# Altium PCB Main.PcbDoc (part 2 of 2)
Units mil, origin at the board's own origin, x right, y up, seen from the top; angles counter-clockwise.
Board outline 5000 x 2500 mil, 2 copper layers (Top Layer, Bottom Layer), stack 62.8 mil thick; 113 components, 93 nets, 434 pads, 302 vias.
Unrouted connection lines stored in the file: 1.
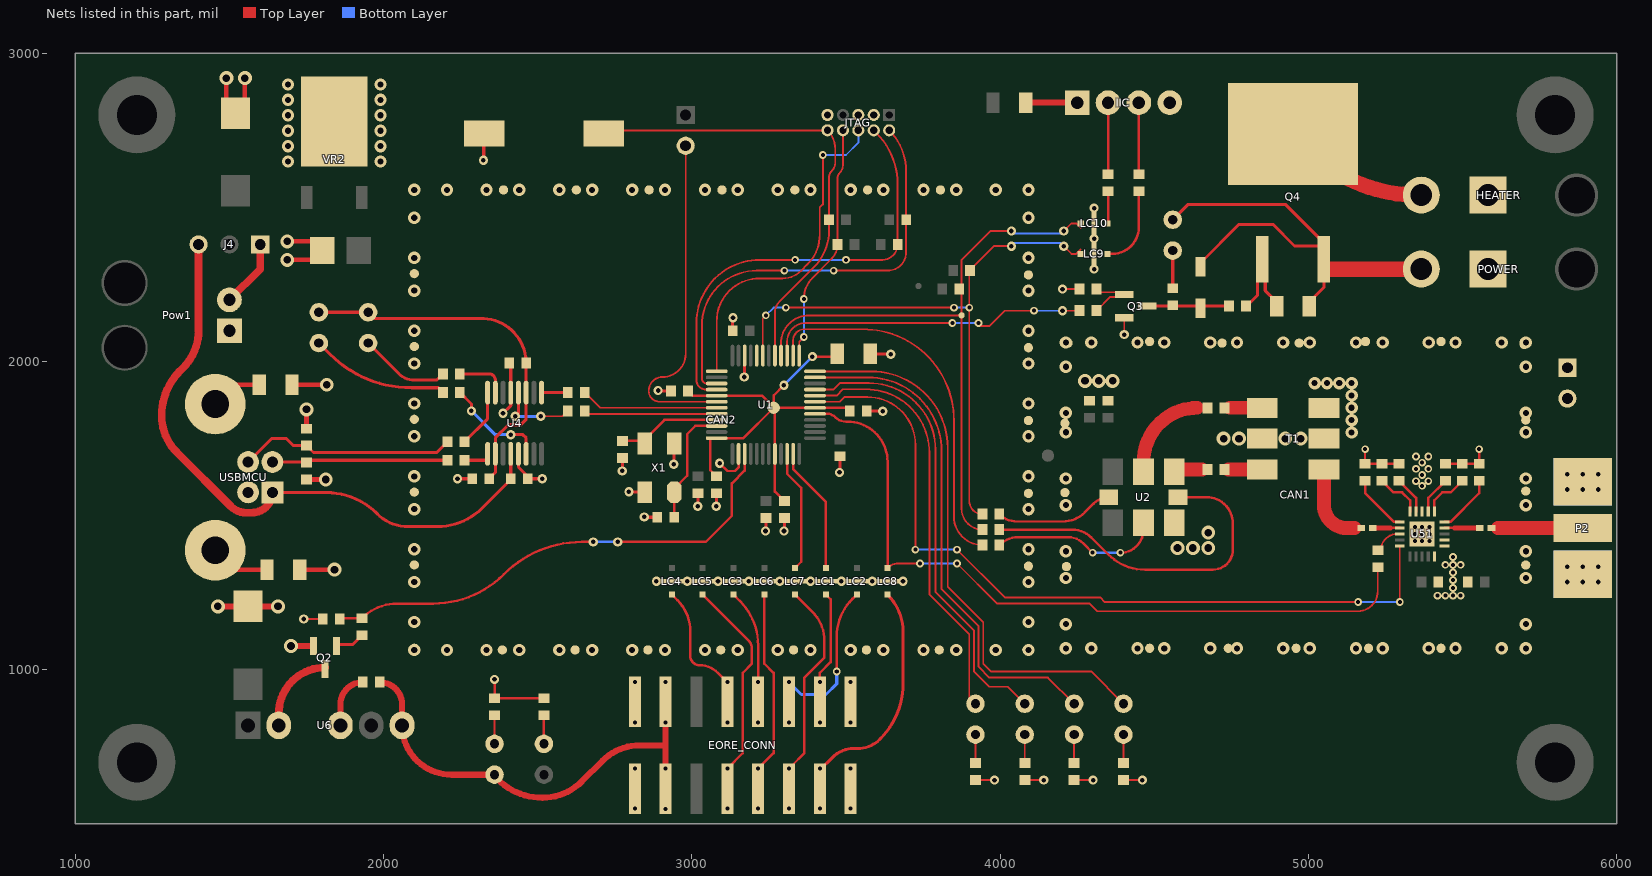
[diagram p2: the nets of this part, all layers, seen from the top]

## Via types
v1: diameter 40, hole 20, Top Layer to Bottom Layer, tented both sides, 124 vias
v2: diameter 25, hole 13, Top Layer to Bottom Layer, tented both sides, 87 vias
v3: diameter 30, hole 15, Top Layer to Bottom Layer, tented both sides, 60 vias
v4: diameter 45, hole 25, Top Layer to Bottom Layer, tented both sides, 22 vias
v5: diameter 25, hole 13, Top Layer to Bottom Layer, 9 vias

## Nets (pads, with @x,y where several pads share a name; then routed paths per layer and width w, separated by ;. In a path a pad name is that pad's centre, name@x,y a point inside that pad or via, vN(x,y) a via of type N, cw(c..) or ccw(c..) an arc to the next point about the centre after c; other vN are vias at no path point) (continued)
CS_5: LC1.3 U1.11 | length 413.9
  Top Layer w8: U1.11@3328.58,1700.55 3328.58,1651.42 3435,1545 LC1.3@3435,1330.75
CS_7: U1.19 U51.5 | length 2588.5
  Top Layer w6: U1.19@3399.45,1869.84 3479.84,1869.84 3495,1885 3570,1885 cw(c3570,1730) 3633.69,1871.31 cw(c3570,1730) 3711.31,1793.69 cw(c3570,1730) 3725,1730 v2(3725,1390) ; v2(3860,1390) 4015,1235 4325,1235 4340,1220 v2(5161.36,1220) ; v2@5296.36,1215 U51.5@5296.36,1401.4
  Bottom Layer w6: v2(3725,1390) v2(3860,1390) ; v2(5161.36,1220) v2(5296.36,1220)
DATA: LC8.1 R57.2 U1.17 | length 2443.5
  Top Layer w6: LC8.1@3635,1330.75 cw(c3669.41,1296.34) 3669.41,1345 v2(3740,1345) ; v2@3850,1345 v2(3860,1345) 3990,1215 4290,1215 4315,1190 5160,1190 ccw(c5160,1255) 5225,1255 R57.2@5225,1332.44
  Top Layer w8: U1.17@3399.45,1830.47 3439.72,1830.47 cw(c3439.72,1794.72) 3464.99,1820.01 3465.86,1819.14 ; 3465.88,1819.12 ccw(c3500,1853.28) 3500,1805 3505,1805 cw(c3505,1675) 3576.29,1783.71 cw(c3505,1675) 3613.71,1746.29 cw(c3505,1675) 3635,1675 LC8.1@3635,1330.75
  Bottom Layer w6: v2(3740,1345) v2(3860,1345)
EN: RG1.1 RG2.2 U1.3 | length 1597.4
  Top Layer w8: RG2.2@1857.56,1165 1860.12,1167.56 RG1.1@1930,1167.56 ; RG1.1@1930,1167.56 cw(c2044.53,1053.03) 2044.53,1215 2160.65,1215 ccw(c2160.65,1539.35) 2390,1310 cw(c2643.49,1056.51) 2643.49,1415 v3(2680,1415) ; v3@2755,1415 v3(2760,1415) 3045,1415 3130,1500 3130,1605 3171.1,1646.1 U1.3@3171.1,1700.55
  Bottom Layer w8: v3(2680,1415) v3(2760,1415)
GND: C4.1 C5.1 C6.1 C7.1 C8.1 C9.1 C10.1 C11.1 C14.1 C15.1 C16.1 C54.1 C56.1 CAN1.1 CAN2.1 CB6.2 CB11.2 CB12.1 CBP2.2 CR3.2 CR4.2 CU1.1 CU2.1 CU3.1 CX1.1 CX2.1 EORE_CONN.1 EORE_CONN.2 EORE_CONN.15 EORE_CONN.16 GND.1 GND.2 HEATER.1 IIC.4 JTAG.3 JTAG.5 JTAG.9 LC1.2 LC2.2 LC3.2 LC4.2 LC5.2 LC6.2 LC7.2 LC8.2 LC9.2 LC10.2 P2.2 Pow1.1 POWER.1 Q2.2 Q3.2 R45.1 R51.2 R52.2 R53.2 R54.2 R55.2 R56.2 RC3.1 RC4.1 RD8.2 RD9.2 RESET.2 RG2.1 RL1.2 RL2.2 RLED8.2 RLED9.2 T1.2 T1.3 T1.5 U1.2 U1.34 U2.3 U4.5 U4.13 U6.4 U51.10 U51.11 U51.12 U51.18 U51.21 USBMCU.4 VR2.4 X1.2 X1.4 | length 3417.2
  Top Layer w6: RD8.2@3920,642.44 v3(3981.57,642.44) ; RD9.2@4080,642.44 v3(4141.57,642.44) ; v3(4202.44,2235) R45.1@4257.44,2235 ; RL2.2@4240,642.44 v3(4301.57,642.44) ; RL1.2@4400,642.44 v3(4461.57,642.44) ; v3(4402.6,2087.6) Q3.2@4402.6,2142.6
  Top Layer w7: v2(5184,1715.77) R54.2@5184,1668.33 R55.2@5294,1668.33 ; R51.2@5444,1668.33 R52.2@5554,1668.33 v2(5554,1715.77)
  Top Layer w8: v3(1740.87,1165) RG2.1@1802.44,1165 ; v3(2360,969.13) RLED9.2@2360,907.56 RLED8.2@2520,907.56 ; v3(3090,1670) 3115,1645 3140,1645 3151.42,1656.42 U1.2@3151.42,1700.55
  Top Layer w10: v3(2240,1620) CU2.1@2287.44,1620 ; v3@2325,2652.99 RESET.2@2325,2705 ; v3(2387.5,1831.97) 2412.5,1856.97 U4.5@2412.5,1899.41 CU3.1@2412.5,1989.94 ; U4.13@2437.5,1700.59 2437.5,1657.5 CU1.1@2465,1630 ; CU1.1@2467.56,1620 v3(2515,1620) ; v3@2775,1645.43 CX2.1@2775,1687.44 ; v3@2795.75,1576.26 X1.4@2847.76,1576.26 ; v3@2845.43,1495 CX1.1@2887.44,1495 ; v3@2890.43,1905 C14.1@2932.44,1905 ; v3@2942.24,1666.73 X1.2@2942.24,1733.74 ; v3@3020,1530.43 C6.1@3020,1572.44 ; v3@3080,1530.43 C11.1@3080,1572.44 ; C15.1@3132.44,2100 v3@3132.44,2142.01 ; v3@3171.1,1950 U1.34@3171.1,2019.45 ; v3@3240,1450.43 C7.1@3240,1492.44 ; v3@3300,1450.43 C8.1@3300,1492.44 ; v3@3480,1640.43 C16.1@3480,1692.44 ; C10.1@3567.56,1840 v3@3619.57,1840 ; C9.1@3578.15,2025 v3@3645.16,2025
  Top Layer w15: CB6.2@1490,2806.93 v4(1490,2919.49) ; CB6.2@1550,2806.93 v4(1550,2919.49) ; v4(1687.44,2330) CBP2.2@1800,2330 ; v4(1687.44,2390) CBP2.2@1800,2390 ; RC3.1@1703.15,1925 v4(1815.71,1925) ; RC4.1@1728.15,1325 v4(1840.71,1325) ; CR3.2@1750,1617.44 v4(1812.56,1617.44) ; CR4.2@1750,1782.56 v4(1750,1845.12)
  Top Layer w20: v4(1462.44,1205.98) CB11.2@1560,1205.98 v4(1657.56,1205.98) ; v4(1700.04,1077.4) Q2.2@1772.6,1077.4 ; U6.4@1860,820 1860,887.56 cw(c1932.44,887.56) CB12.1@1932.44,960
  other v1: 2099.68,1064.69 2205.98,1064.68 2333.94,1064.68 2440.24,1064.68 2570.16,1064.68 2676.46,1064.68 2806.38,1064.68 2912.68,1064.68 3042.6,1064.68 3148.9,1064.68 3278.82,1064.68 3385.12,1064.68 3515.04,1064.68 3621.34,1064.68 3751.26,1064.68 3857.56,1064.68 3985.51,1064.68 4091.81,1064.68 4213.19,1069.68 4295.87,1069.68 4445.47,1069.68 4532.09,1069.68 4681.69,1069.68 4768.31,1069.68 4917.91,1069.68 5004.53,1069.68 5154.13,1069.68 5240.75,1069.68 5390.35,1069.68 5476.97,1069.68 5626.57,1069.68 5705.31,1069.68 4213.19,1148.43 5705.31,1148.43 2099.68,1155.24 4091.81,1155.24 2099.68,1285.16 4091.81,1285.16 4213.19,1298.03 5705.31,1298.03 4213.19,1384.65 5705.31,1384.65 2099.68,1391.46 4091.81,1391.46 2099.68,1521.38 4091.81,1521.38 4213.19,1534.25 5705.31,1534.25 4213.19,1620.87 5705.31,1620.87 2099.68,1627.68 4091.81,1627.68 2099.68,1757.6 4091.81,1757.6 4213.19,1770.47 5140,1770 5705.31,1770.47 5140,1810 4213.19,1833.46 5705.31,1833.46 5140,1850 2099.68,1863.9 4091.81,1863.9 5140,1890 5020,1930 5060,1930 5100,1930 5140,1930 4213.19,1983.07 5705.31,1983.07 2099.68,1993.82 4091.81,1993.82 4213.19,2061.81 4295.87,2061.81 4445.47,2061.81 4532.09,2061.81 4681.69,2061.81 4768.31,2061.81 4917.91,2061.81 5004.53,2061.81 5154.13,2061.81 5240.75,2061.81 5390.35,2061.81 5476.97,2061.81 5626.57,2061.81 5705.31,2061.81 2099.68,2100.12 4091.81,2100.12 2099.68,2230.04 4091.81,2230.04 2099.68,2336.34 4091.81,2336.34 2099.68,2466.26 4091.81,2466.26 2099.69,2556.81 2205.98,2556.81 2333.94,2556.81 2440.24,2556.81 2570.16,2556.81 2676.46,2556.81 2806.38,2556.81 2912.68,2556.81 3042.6,2556.81 3148.9,2556.81 3278.82,2556.81 3385.12,2556.81 3515.04,2556.81 3621.34,2556.81 3751.26,2556.81 3857.56,2556.81 3985.51,2556.81 4091.81,2556.81 1690,2648.9 1990,2648.9 1690,2698.9 1990,2698.9 1690,2748.9 1990,2748.9 1690,2798.9 1990,2798.9 1690,2848.9 1990,2848.9 1690,2898.9 1990,2898.9
  other v2: 2815,550 3515,550 2815,680 3515,680 2815,830 3515,830 2815,960 3515,960 5419,1240.77 5444,1240.77 5469,1240.77 5494,1240.77 5469,1265.77 5469,1290.77 5469,1315.77 5444,1340.77 5469,1340.77 5494,1340.77 5469,1365.77 5369,1597.07 5349,1612.07 5389,1612.07 5369,1632.07 5349,1652.07 5389,1652.07 5369,1672.07 5349,1692.07 5389,1692.07
  other v3: 2885,1287.44 2985,1287.44 3085,1287.44 3185,1287.44 3285,1287.44 3385,1287.44 3485,1287.44 3585,1287.44 3685,1287.44 3238.9,1450.43 3298.9,1450.43 2845.43,1496.1 3018.9,1530.43 3078.9,1530.43 2795.75,1577.36 3478.9,1640.43 2773.9,1645.43 2941.14,1666.73 3619.57,1838.9 2890.43,1906.1 3170,1950 3645.16,2023.9 3133.54,2142.01 4304.76,2299.9 4304.76,2398.89 4304.76,2497.89 2323.9,2652.99
  other v4: 4575,1395 4625,1395 4675,1395 4675,1445 4725,1750 4775,1750 4925,1750 4975,1750 4275,1937.56 4320,1937.56 4365,1937.56
  other v5: 5346,1417.77 5369,1417.77 5392,1417.77 5346,1440.77 5369,1440.77 5392,1440.77 5346,1463.77 5369,1463.77 5392,1463.77
HEAT: R43.1 U1.27 U1.32 | length 1049.1
  Top Layer w6: U1.27@3308.9,2019.45 3308.9,2065 cw(c3368.9,2065) 3320.6,2100.6 cw(c3368.9,2065) 3333.3,2113.3 cw(c3368.9,2065) 3368.9,2125 v2(3845,2125) ; v2@3930,2115 3965,2115 4015,2165 v2(4110,2165) ; v3(4202.44,2165) R43.1@4257.44,2165
  Bottom Layer w6: v2(3845,2125) v2(3930,2125) ; v2(4110,2165) v3(4202.44,2165)
HEAT_PWR: D7.1 D8.1 POWER.2 Q4.3 R46.2 | length 1586.7
  Top Layer w6: Q4.3@5050,2331.97 Q4.3@5050,2350
  Top Layer w10: D7.1@4560,2460 4610,2510 4925,2510 5050,2385 Q4.3@5050,2375 ; D8.1@4650,2306.93 4650,2320 4775,2445 4885,2445 4955,2375 Q4.3@5050,2375 ; R46.2@5003.15,2180 5003.15,2193.15 5050,2240 Q4.3@5050,2331.97 ; Q4.3@5050,2350 Q4.3@5050,2375
  Top Layer w50: Q4.3@5060,2300 POWER.2@5366,2300
LV_CLK: EORE_CONN.12 LC2.1 | length 494.7
  Top Layer w8: v2(3470,995) 3470,1107.2 cw(c3643.67,1107.2) 3520.84,1229.97 ; 3520.87,1230 LC2.1@3535,1244.13
  Bottom Layer w10: v2(3315,960) 3355,920 3435,920 3470,955 v2(3470,995)
  other v2: 3315,830
LV_CS_1: EORE_CONN.8 LC4.3 | length 438
  Top Layer w8: LC4.3@2935,1244.13 2952.72,1226.42 cw(c2850.64,1124.34) 2995,1124.34 2995,1045 ccw(c3025,1045) 3025,1015 cw(c3025,930.5) 3084.72,990.28 ; 3084.75,990.25 v2(3115,960) EORE_CONN.8@3115,896
  other v2: 3115,830
LV_CS_2: EORE_CONN.7 LC5.1 | length 728.1
  Top Layer w8: LC5.1@3035,1244.13 3185.01,1094.13 ; v2(3115,680) 3165,730 3165,990 3195,1020 3195,1070 ccw(c3160.88,1070) 3185.02,1094.11
  Top Layer w10: EORE_CONN.7@3115,614 v2(3115,680)
  other v2: 3115,550
LV_CS_3: EORE_CONN.10 LC3.3 | length 372.5
  Top Layer w8: LC3.3@3135,1244.13 3155.51,1223.63 cw(c3011.88,1080) 3215,1080 v2(3215,960) EORE_CONN.10@3215,896
  other v2: 3215,830
LV_CS_4: EORE_CONN.9 LC6.1 | length 663.3
  Top Layer w8: v2(3215,680) 3265,730 3265,990 3235,1020 LC6.1@3235,1244.13
  Top Layer w10: EORE_CONN.9@3215,614 v2(3215,680)
  other v2: 3215,550
LV_CS_5: EORE_CONN.14 LC1.1 | length 368.8
  Top Layer w8: EORE_CONN.14@3415,896 3415,990 3450,1025 3450,1229.13 LC1.1@3435,1244.13
  other v2: 3415,830 3415,960
LV_MOSI: EORE_CONN.13 LC8.3 | length 791.4
  Top Layer w10: EORE_CONN.13@3415,614 3415,675 3456.72,716.72 cw(c3525,648.43) 3525,745 3537.57,745 ccw(c3537.57,847.43) 3581.72,755 ccw(c3537.57,847.43) 3610,775 ccw(c3428.93,956.07) 3685,956.07 3685,1123.42 ccw(c3514.29,1123.42) LC8.3@3635,1244.13 ccw(c3514.29,1123.42) LC8.3@3635,1244.13
  other v2: 3415,550 3415,680
LV_SW_1: EORE_CONN.11 LC7.3 | length 711.5
  Top Layer w8: EORE_CONN.11@3322.5,687.5 3365,730 3365,975 3430,1040 3430,1094.57 ccw(c3298.26,1094.57) 3391.46,1187.67 ccw(c3298.26,1094.57) 3391.42,1187.72 LC7.3@3335,1244.13
  Top Layer w10: EORE_CONN.11@3315,614 v2(3315,680) EORE_CONN.11@3322.5,687.5
  other v2: 3315,550
ND_OUT: CB12.2 EORE_CONN.3 EORE_CONN.4 LED9.1 U6.6 | length 1492.3
  Top Layer w10: EORE_CONN.3@2915,614 v2(2915,680) ; v2(2915,830) EORE_CONN.4@2915,896
  Top Layer w20: CB12.2@1987.56,960 cw(c1987.56,887.56) 2060,887.56 U6.6@2060,820 ccw(c2220,820) 2220,660 LED9.1@2355,660 ; LED9.1@2360,660 LED9.1@2355,660 ; v2(2915,680) 2915,755 ; v2(2915,830) 2915,755 ; LED9.1@2355,660 2369.9,645.1 ccw(c2515,790.21) 2515,585 ccw(c2515,766.07) 2643.03,638.03 2710.5,705.5 cw(c2830,586.01) 2830,755 2915,755
  other v2: 2915,548 2915,960
NetC1_1: C1.1 U2.4 | length 94.2
  Top Layer w44.65: U2.4@4565,1642.68 cw(c4572.32,1642.68) 4572.32,1650 4655,1650
NetC1_2: C1.2 T1.6 | length 110
  Top Layer w44.65: C1.2@4740,1650 T1.6@4850,1650
NetC2_1: C2.1 U2.5 | length 307.2
  Top Layer w44: U2.5@4465,1642.68 4465,1675 cw(c4640,1675) 4640,1850
NetC2_2: C2.2 T1.4 | length 105
  Top Layer w44.65: 4745,1850 T1.4@4850,1850
NetC28_1: C28.1 T1.1 | length 257.8
  Top Layer w45: T1.1@5050,1650 5050,1535 ccw(c5125,1535) 5125,1460 5150,1460
NetC29_2: C29.2 P2.1 | length 275
  Top Layer w45: 5615,1460 5650,1460 P2.1@5890,1460
NetCU1_2: CU1.2 J4.3 U4.12 USBMCU.1 | length 2089.4
  Top Layer w10: USBMCU.1@1645,1575 1814.54,1575 cw(c1814.54,1344.54) 1977.46,1507.54 cw(c1814.54,1344.54) 1977.5,1507.5 ccw(c2080.1,1610.1) 2080.1,1465 2175,1465 ccw(c2175,1670.21) 2320.05,1525.05 ccw(c2175,1670.21) 2320.1,1525.1 CU1.2@2410.63,1615.63 ; CU1.2@2412.44,1620 cw(c2406.26,1620) CU1.2@2410.64,1615.64 ; U4.12@2412.5,1700.59 2412.5,1620.06 2415,1617.56 2412.56,1617.56 CU1.2@2410.64,1615.64
  Top Layer w25: J4.3@1400,2380 1400,2100.71 cw(c1229.29,2100.71) 1350.05,1980.05 cw(c1229.29,2100.71) 1350,1980 1340.1,1970.1 ccw(c1485.21,1825) 1340.05,1970.05 ccw(c1485.21,1825) 1280,1825 ccw(c1448.99,1825) 1329.5,1705.5 1505,1530 ccw(c1553.28,1578.28) 1553.28,1510 1573.58,1510 ccw(c1573.58,1575.79) 1586.23,1511.23 ccw(c1573.58,1575.79) 1638.14,1563.14 ccw(c1573.58,1575.79) USBMCU.1@1639.37,1575.79
NetCX1_2: CX1.2 U1.46 X1.1 | length 394.2
  Top Layer w8: CX1.2@2942.56,1495 2942.24,1495.32 X1.1@2942.24,1576.26 2942.24,1587.24 2985,1630 2985,1765 3011.1,1791.1 U1.46@3080.55,1791.1
NetCX2_2: CX2.2 U1.45 X1.3 | length 333.8
  Top Layer w8: CX2.2@2775,1742.56 2842.56,1742.56 2910.79,1810.79 U1.45@3080.55,1810.79
NetD1_1: D1.1 U1.24 | length 1828.7
  Top Layer w6: U1.24@3399.45,1968.27 3581.73,1968.27 cw(c3581.73,1720) 3830,1720 3830,1270 3945,1155 3945,1020 3970,995 4295,995 D1.1@4400,890
NetD1_2: D1.2 RL1.1 | length 92.4
  Top Layer w6: RL1.1@4400,697.56 D1.2@4400,790
NetD2_1: D2.1 U1.23 | length 1656.3
  Top Layer w6: U1.23@3399.45,1948.58 3571.73,1948.58 cw(c3571.73,1710) 3663.14,1930.38 cw(c3571.73,1710) 3792.11,1801.41 cw(c3571.73,1710) 3810.32,1710 3810.32,1261.85 3930,1142.16 3930,1010 3965,975 4155,975 D2.1@4240,890
NetD2_2: D2.2 RL2.1 | length 92.4
  Top Layer w6: RL2.1@4240,697.56 D2.2@4240,790
NetD5_1: D5.1 U1.20 | length 1373.4
  Top Layer w6: U1.20@3399.45,1889.53 3469.53,1889.53 3490,1910 3565.32,1910 cw(c3565.32,1705) 3642.07,1895.09 cw(c3565.32,1705) 3755.4,1781.76 cw(c3565.32,1705) 3770.32,1705 3770.32,1245.28 3900,1115.59 3900,910 D5.1@3920,890
NetD5_2: D5.2 RD8.1 | length 92.4
  Top Layer w6: RD8.1@3920,697.56 D5.2@3920,790
NetD6_1: D6.1 U1.21 | length 1502.2
  Top Layer w6: U1.21@3399.45,1909.21 3459.21,1909.21 3480,1930 3575,1930 cw(c3575,1715) 3647.64,1917.36 cw(c3575,1715) 3777.36,1787.64 cw(c3575,1715) 3790,1715 3790,1253.43 3915,1128.43 3915,995 3965,945 4025,945 D6.1@4080,890
NetD6_2: D6.2 RD9.1 | length 92.4
  Top Layer w6: RD9.1@4080,697.56 D6.2@4080,790
NetD7_2: D7.2 RD10.1 | length 112.4
  Top Layer w10: RD10.1@4560,2247.56 D7.2@4560,2360
NetD8_2: D8.2 Q3.3 R47.2 RD10.2 | length 265
  Top Layer w10: Q3.3@4477.4,2180 R47.2@4742.44,2180
NetDRX_2: DRX.2 RU4.1 | length 452.6
  Top Layer w10: DRX.2@1790,2060 1825.4,2024.6 ccw(c2090,2289.2) 2090,1915 2177.44,1915 RU4.1@2192.44,1900
NetDTX_2: DTX.2 RU3.1 | length 297.3
  Top Layer w10: DTX.2@1950,2060 2048.79,1961.21 ccw(c2100,2012.43) 2100,1940 2172.44,1940 RU3.1@2192.44,1960
NetERASE_2: ERASE.2 U1.42 | length 1104.1
  Top Layer w6: ERASE.2@2980,2700 2980,2025 cw(c2905,2025) 2978.06,2008.06 cw(c2905,2025) 2921.94,1951.94 cw(c2905,2025) 2905,1950 ccw(c2905,1905) 2860,1905 2860,1904.92 ccw(c2895.08,1904.92) 2895.08,1869.84 U1.42@3080.55,1869.84
NetHEATER_2: HEATER.2 Q4.4 | length 476.3
  Top Layer w50: Q4.4@4950,2737.48 5001.03,2686.45 ccw(c5354.59,3040) 5354.59,2540 HEATER.2@5366,2540
NetIIC_1: IIC.1 R44.1 | length 146.9
  Top Layer w20: R44.1@4083.15,2840 IIC.1@4230,2840
NetIIC_2: IIC.2 R41.2 | length 232.4
  Top Layer w8: R41.2@4350,2607.56 IIC.2@4350,2840
NetIIC_3: IIC.3 R42.2 | length 232.4
  Top Layer w8: R42.2@4450,2607.56 IIC.3@4450,2840
NetJ1_1: J1.1 U2.8 | length 1148.7
  Top Layer w8: J1.1@3997.56,1455 4234.64,1455 cw(c4234.64,1369.64) 4295,1430 4350.5,1374.5 ccw(c4470,1493.99) 4470,1325 4690,1325 ccw(c4690,1390) 4755,1390 4755,1475 ccw(c4670,1475) 4745,1515 ccw(c4670,1475) 4710,1550 ccw(c4670,1475) 4670,1560 U2.8@4577.3,1560
NetJ2_1: J2.1 U2.7 | length 386.8
  Top Layer w8: J2.1@3997.56,1505 ccw(c4054.97,1562.41) 4054.97,1481.22 4203.51,1481.22 ccw(c4203.51,1581.22) 4274.22,1510.51 4303.22,1539.51 cw(c4352.7,1490.03) U2.7@4352.7,1560
NetJ3_1: J3.1 U2.2 | length 557
  Top Layer w8: J3.1@3997.56,1405 cw(c4057.91,1344.64) 4057.91,1430 4221.72,1430 cw(c4221.72,1361.72) 4270,1410 v2(4300,1380) ; v2(4390,1380) ccw(c4390,1455) 4451.97,1412.76 ccw(c4390,1455) 4465,1455 U2.2@4465,1477.32
  Bottom Layer w8: v2(4300,1380) v2(4390,1380)
NetJ4_1: J4.1 Pow1.2 | length 221.4
  Top Layer w25: Pow1.2@1500,2200 1600,2300 J4.1@1600,2380
NetLC9_3: LC9.3 R42.1 | length 270.5
  Top Layer w8: LC9.3@4348.07,2349.39 4363.82,2349.39 ccw(c4363.82,2435.57) 4450,2435.57 R42.1@4450,2555
NetLC10_1: LC10.1 R41.1 | length 107.4
  Top Layer w8: LC10.1@4348.07,2448.39 4350,2450.32 R41.1@4350,2555
NetLED8_2: LED8.2 RLED8.1 | length 92.4
  Top Layer w8: LED8.2@2520,760 RLED8.1@2520,852.44
NetLED9_2: LED9.2 RLED9.1 | length 92.4
  Top Layer w6: LED9.2@2360,760 RLED9.1@2360,852.44
NetQ2_1: Q2.1 RG1.2 | length 95
  Top Layer w10: Q2.1@1847.4,1082.4 1899.96,1082.4 RG1.2@1930,1112.44
NetQ2_3: Q2.3 U6.2 | length 290.8
  Top Layer w20: Q2.3@1810,990 Q2.3@1810,1002.6 Q2.3@1810,1007.6
  Top Layer w25: U6.2@1660,820 1660,857.6 cw(c1810,857.6) Q2.3@1810,1007.6
NetQ3_1: Q3.1 R43.2 R45.2 | length 207.9
  Top Layer w6: R43.2@4312.56,2165 4357.56,2210 Q3.1@4405.2,2210 ; R45.2@4312.56,2235 4322.56,2225 Q3.1@4405,2225
NetQ4_1: Q4.1 R46.1 R47.1 | length 276.8
  Top Layer w6: Q4.1@4835,2275 4850,2290 Q4.1@4850,2320
  Top Layer w10: R47.1@4798.78,2178.78 4835,2215 Q4.1@4835,2275 ; Q4.1@4850,2275 4860,2265 4860,2230 4896.85,2193.15 R46.1@4896.85,2180
NetR1_1: R1.1 U4.1 | length 84.9
  Top Layer w10: U4.1@2512.5,1899.41 R1.1@2597.44,1899.41
NetR8_1: R8.1 U4.4 | length 258.2
  Top Layer w6: v3(2510,1822.5) 2579.94,1822.5 R8.1@2597.44,1840
  Top Layer w10: v3(2427.5,1822.5) 2437.5,1832.5 U4.4@2437.5,1899.41
  Bottom Layer w10: v3(2427.5,1822.5) v3(2510,1822.5)
NetR51_1: R51.1 U51.17 | length 122.7
  Top Layer w8: U51.17@5388.69,1513.41 5388.69,1557.9 R51.1@5444,1613.21
NetR52_1: R52.1 U51.15 | length 190.9
  Top Layer w8: U51.15@5441.64,1480.14 5460.93,1480.14 5554,1573.21 R52.1@5554,1613.21
NetR53_1: R53.1 U51.16 | length 153.5
  Top Layer w8: U51.16@5408.37,1513.41 5408.37,1550.14 5434,1575.77 5461.56,1575.77 R53.1@5499,1613.21
NetR54_1: R54.1 U51.1 | length 190.9
  Top Layer w8: R54.1@5184,1613.21 5184,1573.21 5277.07,1480.14 U51.1@5296.36,1480.14
NetR55_1: R55.1 U51.19 | length 122.7
  Top Layer w8: R55.1@5294,1613.21 5349.32,1557.9 U51.19@5349.32,1513.41
NetR56_1: R56.1 U51.20 | length 153.5
  Top Layer w8: R56.1@5239,1613.21 5276.44,1575.77 5304,1575.77 5329.63,1550.14 U51.20@5329.63,1513.41
NetR57_1: R57.1 U51.3 | length 91.7
  Top Layer w6: R57.1@5235,1387.56 cw(c5288.21,1387.56) 5252.74,1427.23 cw(c5288.21,1387.56) 5288.21,1440.77 U51.3@5296.36,1440.77
NetRC3_2: RC3.2 USBMCU.5 | length 169
  Top Layer w15: USBMCU.5@1453.94,1862.01 1516.93,1925 RC3.2@1596.85,1925
NetRC4_2: RC4.2 USBMCU.6 | length 194
  Top Layer w15: USBMCU.6@1453.94,1387.99 1516.93,1325 RC4.2@1621.85,1325
NetRU5_2: RU5.2 U4.8 | length 203
  Top Layer w10: RU5.2@2257.44,1727.44 RU5.2@2266.28,1736.28 ; RU5.2@2262.56,1740 2337.5,1814.94 U4.8@2337.5,1899.41
NetRU6_2: RU6.2 U4.9 | length 92.4
  Top Layer w10: RU6.2@2262.56,1680 2337.5,1680 U4.9@2337.5,1697.5
OSC_EN: J3.2 U1.26 | length 1217.5
  Top Layer w6: U1.26@3328.58,2019.45 3328.58,2068.58 cw(c3365,2068.58) 3337.82,2092.82 cw(c3365,2068.58) 3340.77,2095.77 cw(c3365,2068.58) 3365,2105 3555,2105 cw(c3555,1810) 3616.48,2098.52 cw(c3555,1810) 3843.52,1871.48 cw(c3555,1810) 3850,1810 3850,1497.44 ccw(c3942.44,1497.44) J3.2@3942.44,1405
RESET: JTAG.10 R6.1 RESET.1 U1.29 | length 1536.2
  Top Layer w6: RESET.1@2713.9,2740 2723.9,2750 JTAG.10@3440,2750 cw(c3379.64,2689.64) 3440.11,2749.89 cw(c3379.64,2689.64) 3465,2689.64 3465,2644.23 cw(c3430.66,2644.23) 3454.94,2619.94 ccw(c3479.23,2595.66) 3444.88,2595.66 R6.1@3444.88,2460 3444.88,2425 cw(c3275.6,2425) 3395.34,2305.34 cw(c3275.6,2425) 3395.3,2305.3 3283.34,2193.34 ccw(c3316.67,2160) 3269.53,2160 U1.29@3269.53,2019.45
"RF IN": C28.2 U51.2 | length 86.4
  Top Layer w8: 5266.64,1460.46 U51.2@5296.36,1460.46
  Top Layer w17: C28.2@5210,1460.46 5266.64,1460.46
"RF OUT": C29.1 U51.14 | length 110.7
  Top Layer w8: U51.14@5441.64,1460.46 5471.36,1460.46
  Top Layer w17: 5473.98,1460.46 C29.1@5555,1460.46
RXD: R8.2 U1.44 | length 431.9
  Top Layer w6: R8.2@2652.56,1840 2662.09,1830.47 U1.44@3080.55,1830.47
RXLED: RU4.2 U4.14 | length 341.2
  Top Layer w10: RU4.2@2247.56,1900 2285,1862.56 v3(2285,1840) ; v3(2412.5,1763.03) 2451.97,1763.03 2462.5,1752.5 U4.14@2462.5,1700.59
  Bottom Layer w10: v3(2285,1840) 2361.97,1763.03 v3(2412.5,1763.03)
SCL: J1.2 LC10.3 pad.0@3875,2150 RP1.1 U1.28 | length 2039.5
  Top Layer w6: U1.28@3289.21,2019.45 3289.21,2059.21 cw(c3380,2059.21) 3304.24,2109.24 cw(c3380,2059.21) 3329.97,2134.97 cw(c3380,2059.21) 3380,2150 pad.0@3875,2150 ; J1.2@3942.44,1455 cw(c3942.44,1522.44) 3875,1522.44 pad.0@3875,2150 ; v3(4036.61,2423.39) 3968.39,2423.39 3875,2330 pad.0@3875,2150 ; v3(4206.46,2423.39) 4231.46,2448.39 4246.46,2448.39 4261.46,2433.39
  Bottom Layer w6: v3(4036.61,2423.39) 4045,2415 4198.07,2415 v3(4206.46,2423.39)
SDA: J2.2 LC9.1 RP2.1 U1.31 | length 2025
  Top Layer w6: U1.31@3230.16,2019.45 3230.16,2140.16 ; v2(3305,2175) v2(3850,2175) ; J2.2@3942.44,1505 cw(c3942.44,1547.44) 3900,1547.44 v2(3900,2175) 3900,2295 3979.39,2374.39 v3(4036.61,2374.39) ; v3(4206.46,2374.39) 4231.46,2349.39 4246.46,2349.39 4261.46,2364.39
  Bottom Layer w6: v2(3240,2150) 3265,2175 v2(3305,2175) ; v2(3850,2175) v2(3900,2175) ; v3(4036.61,2374.39) 4047.22,2385 4195.85,2385 v3(4206.46,2374.39)
SW_1: LC7.1 U1.10 | length 397.2
  Top Layer w8: U1.10@3308.9,1700.55 3308.9,1636.1 3355,1590 3355,1350.75 LC7.1@3335,1330.75
TCK: JTAG.4 R2.1 U1.40 | length 1458.2
  Top Layer w6: U1.40@3080.55,1909.21 3045.79,1909.21 cw(c3045.79,1940) 3015,1940 3015,2125 cw(c3220,2125) 3025.87,2190.87 cw(c3220,2125) 3154.13,2319.13 cw(c3220,2125) 3220,2330 v2(3335,2330) ; v2(3500,2330) 3617.56,2330 ccw(c3617.56,2380) 3620.06,2330.06 ccw(c3617.56,2380) 3667.5,2377.5 ccw(c3617.56,2380) R2.1@3667.56,2380 3667.56,2575 ccw(c3432.32,2575) 3598.66,2741.34 JTAG.4@3590,2750
  Bottom Layer w6: v2(3335,2330) v2(3500,2330)
TDI: JTAG.8 R4.1 U1.25 | length 779.7
  Top Layer w6: U1.25@3348.27,2019.45 3348.27,2065 v2(3363.27,2080) ; v2(3363.27,2203.27) cw(c3459.84,2203.27) 3391.55,2271.55 3452.95,2332.95 ; 3452.98,2332.98 ccw(c3405.91,2380) R4.1@3472.44,2380 3472.44,2594.31 cw(c3498.25,2594.31) 3480,2612.56 ; 3480.02,2612.58 ccw(c3455.86,2636.7) 3490,2636.7 JTAG.8@3490,2750
  Bottom Layer w6: v2(3363.27,2080) v2(3363.27,2203.27)
TDO: JTAG.6 U1.37 | length 1092.7
  Top Layer w6: U1.37@3080.55,1968.27 3080.55,2130.55 cw(c3220,2130.55) 3092.88,2187.88 cw(c3220,2130.55) 3162.67,2257.67 cw(c3220,2130.55) 3220,2270 3295,2270 ccw(c3295,2354.5) 3354.72,2294.72 ; 3354.75,2294.75 3375,2315 ccw(c3278.43,2411.57) 3375.05,2315.05 ccw(c3278.43,2411.57) 3415,2411.57 3415,2500 3425,2510 v2(3425,2670)
  Bottom Layer w6: v2(3425,2670) 3500,2670 3540,2710 JTAG.6@3540,2750
TMS: JTAG.2 R3.1 U1.39 | length 1437.3
  Top Layer w6: U1.39@3080.55,1928.9 3048.78,1928.9 cw(c3048.78,1945) 3032.68,1945 3032.68,2117.68 cw(c3210,2117.68) 3046.64,2186.64 cw(c3210,2117.68) 3141.04,2281.04 cw(c3210,2117.68) 3210,2295 v2(3300,2295) ; v2(3460,2295) 3635,2295 ccw(c3635,2355.12) 3652.65,2297.65 ccw(c3635,2355.12) 3692.47,2337.47 ccw(c3635,2355.12) 3695.12,2355.12 R3.1@3695.12,2460 3695.12,2616.93 ccw(c3506.93,2616.93) 3640.06,2749.94 ccw(c3506.93,2616.93) JTAG.2@3640,2750
  Bottom Layer w6: v2(3300,2295) v2(3460,2295)
TXD: R1.2 U1.43 | length 448.8
  Top Layer w6: R1.2@2652.56,1900 2702.56,1850 2795,1850 2795.16,1850.16 U1.43@3080.55,1850.16
TXLED: RU3.2 U4.7 | length 166.9
  Top Layer w10: RU3.2@2247.56,1960 2342.5,1960 cw(c2342.5,1940) 2362.5,1940 U4.7@2362.5,1899.41
U3V3: CU2.2 CU3.2 DRX.1 DTX.1 U4.3 U4.10 | length 1211.7
  Top Layer w10: DRX.1@1790,2160 DTX.1@1950,2160 1970,2140 2317.5,2140 cw(c2317.5,1995) 2325.2,2139.8 cw(c2317.5,1995) 2462.3,2002.7 cw(c2317.5,1995) 2462.5,1995 U4.3@2462.5,1899.41 2462.5,1812.5 2445,1795 2405,1795 2362.5,1752.5 U4.10@2362.5,1700.59 2362.5,1639.94 CU2.2@2342.56,1620
USB_N: CR3.1 RU6.1 USBMCU.2 | length 581.9
  Top Layer w10: USBMCU.2@1639.37,1674.21 CR3.1@1751.65,1674.21 ; CR3.1@1750,1672.56 CR3.1@1751.65,1674.21 ; RU6.1@2201.65,1674.21 ccw(c2201.65,1680) RU6.1@2207.44,1680 1757.44,1680 CR3.1@1751.65,1674.21
USB_P: CR4.1 RU5.1 USBMCU.3 | length 711.3
  Top Layer w10: USBMCU.3@1560.63,1674.21 1636.42,1750 1685,1750 1707.56,1727.44 CR4.1@1750,1727.44 1772.44,1705 2172.44,1705 RU5.1@2207.44,1740
VDDCORE: C8.2 C9.2 C10.2 C11.2 C14.2 pad.0@3265.51,1850.16 U1.8 U1.18 U1.41 U1.48 | length 1549.1
  Top Layer w8: C14.2@2987.56,1905 3003.03,1889.53 U1.41@3080.55,1889.53 3227.87,1889.53 pad.0@3265.51,1851.88 ; C11.2@3080,1627.56 3060,1647.56 3060,1751.73 U1.48@3080.55,1751.73 3167.09,1751.73 pad.0@3265.51,1850.16 pad.0@3267.24,1850.16 ; v3(3298.53,1923.53) 3265.51,1890.51 3265.51,1880 pad.0@3265.51,1851.88 ; C8.2@3300,1547.56 3269.53,1578.03 U1.8@3269.53,1700.55 3269.53,1847.87 pad.0@3267.24,1850.16 ; v3(3391.1,2016.1) 3462.95,2016.1 C9.2@3471.85,2025 ; C10.2@3512.44,1840 3502.28,1850.16 pad.0@3267.24,1850.16 ; pad.0@3265.51,1851.88 pad.0@3267.24,1850.16
  Bottom Layer w8: v3(3298.53,1923.53) v3(3391.1,2016.1)
pads on no net: HEATER.0 JTAG.7 Pow1.0 POWER.0 U1.12 U1.14 U1.15 U1.22 U1.30 U1.35 U1.36 U1.38 U2.1 U4.2 U4.6 U4.11 U4.15 U4.16 U6.5 U51.7 U51.8

## Polygon pours and split planes (outlines as drawn)
GND on Bottom Layer "Gnd" (solid, pour order 2): 1050,550 5950,550 5950,2950 1050,2950 1050,602.17 1050,550
GND on Top Layer "Bottom Layer-No Net" (solid, pour order 31): 5516.46,1368.32 5459,1425.77 5429,1425.77 5429,1380.77 5409,1380.77 5409,1215.77 5516.46,1215.77
GND on Top Layer "Bottom Layer-No Net" (solid, pour order 40): 5364,1507.07 5374,1507.07 5374,1572.07 5404,1602.07 5404,1708.21 5334,1708.21 5334,1602.07 5364,1572.07

## Keep-outs
Keep-Out Layer:
  the board outline again, w10

## Other copper
Top Layer:
  region net 3V3: 4375,1820 4260,1820 4260,1635 4375,1635
  region net GND: 5005,1950 5005,1740 5160,1740 5160,1950
  region net GND: 5025,1775 4700,1775 4700,1725 5025,1725
  rectangle net GND: 1665,2633.9 2015,2923.9
  region net GND: 4385,1877.56 4385,1962.56 4255,1962.56 4255,1877.56
  rectangle net GND: 4545,1365 4705,1490

## Silkscreen, mask and mechanical layers (free items; w line width, h text height)
Top Overlay:
  the board outline again, w10
  text "+" at 1640,2180 h60 r90
  text "-" at 1640,2080 h60 r90
  text "EORE Controller" at 4520,885 h100
  text "Tigger board" at 4560,805 h50
  text "R2," at 4565,730 h40
  text ".Print_Date" at 4770,730 h40
  text "C. Wolf" at 4565,650 h40
  text ".VersionControl_RevNumber" at 4840,650 h40
  text "15V" at 2250,545 h50
  text "3.3V" at 2415,545 h50
Top Paste:
  the board outline again, w10
Top Solder:
  pour cut-out: 5145,1435.01 5235,1435.01 5235,1485.01 5145,1485.01
  pour cut-out: 5530,1435.01 5620,1435.01 5620,1485.01 5530,1485.01
Bottom Solder:
  pour cut-out: 5497.56,1263 5497.56,1213 5447.56,1213 5447.56,1263
  pour cut-out: 5479.98,1740.77 5479.98,1690.77 5429.98,1690.77 5429.98,1740.77
Mechanical 15:
  lines w8: 1060,560 1200,700 ; 1060,840 1200,700 ; 1060,2660 1200,2800 ; 1060,2940 1200,2800 ; 1340,560 1200,700 ; 1340,840 1200,700 ; 1340,2660 1200,2800 ; 1340,2940 1200,2800 ; 5660,560 5800,700 ; 5660,840 5800,700 ; 5660,2660 5800,2800 ; 5660,2940 5800,2800 ; 5940,560 5800,700 ; 5940,840 5800,700 ; 5940,2660 5800,2800 ; 5940,2940 5800,2800

## Dimensions
1000,1260.83 to 1000,500 on Mechanical 1

## Text inside footprints (layer, text, board x,y; h text height)
JTAG: Top Overlay "1" at 3702.99,2820 h39.37 r180; Top Overlay "9" at 3384.09,2820 h39.37 r180
P2: Mechanical 1 "Board Edge" at 6060,1730 h60 r270
U6: Top Overlay "4" at 1835,695 h60; Top Overlay "6" at 2035,695 h60; Top Overlay "5" at 1935,695 h60; Top Overlay "2" at 1635,695 h60; Top Overlay "1" at 1535,695 h60